# EAGLE board AHNS_Dev_Brd (EAGLE 5.08)
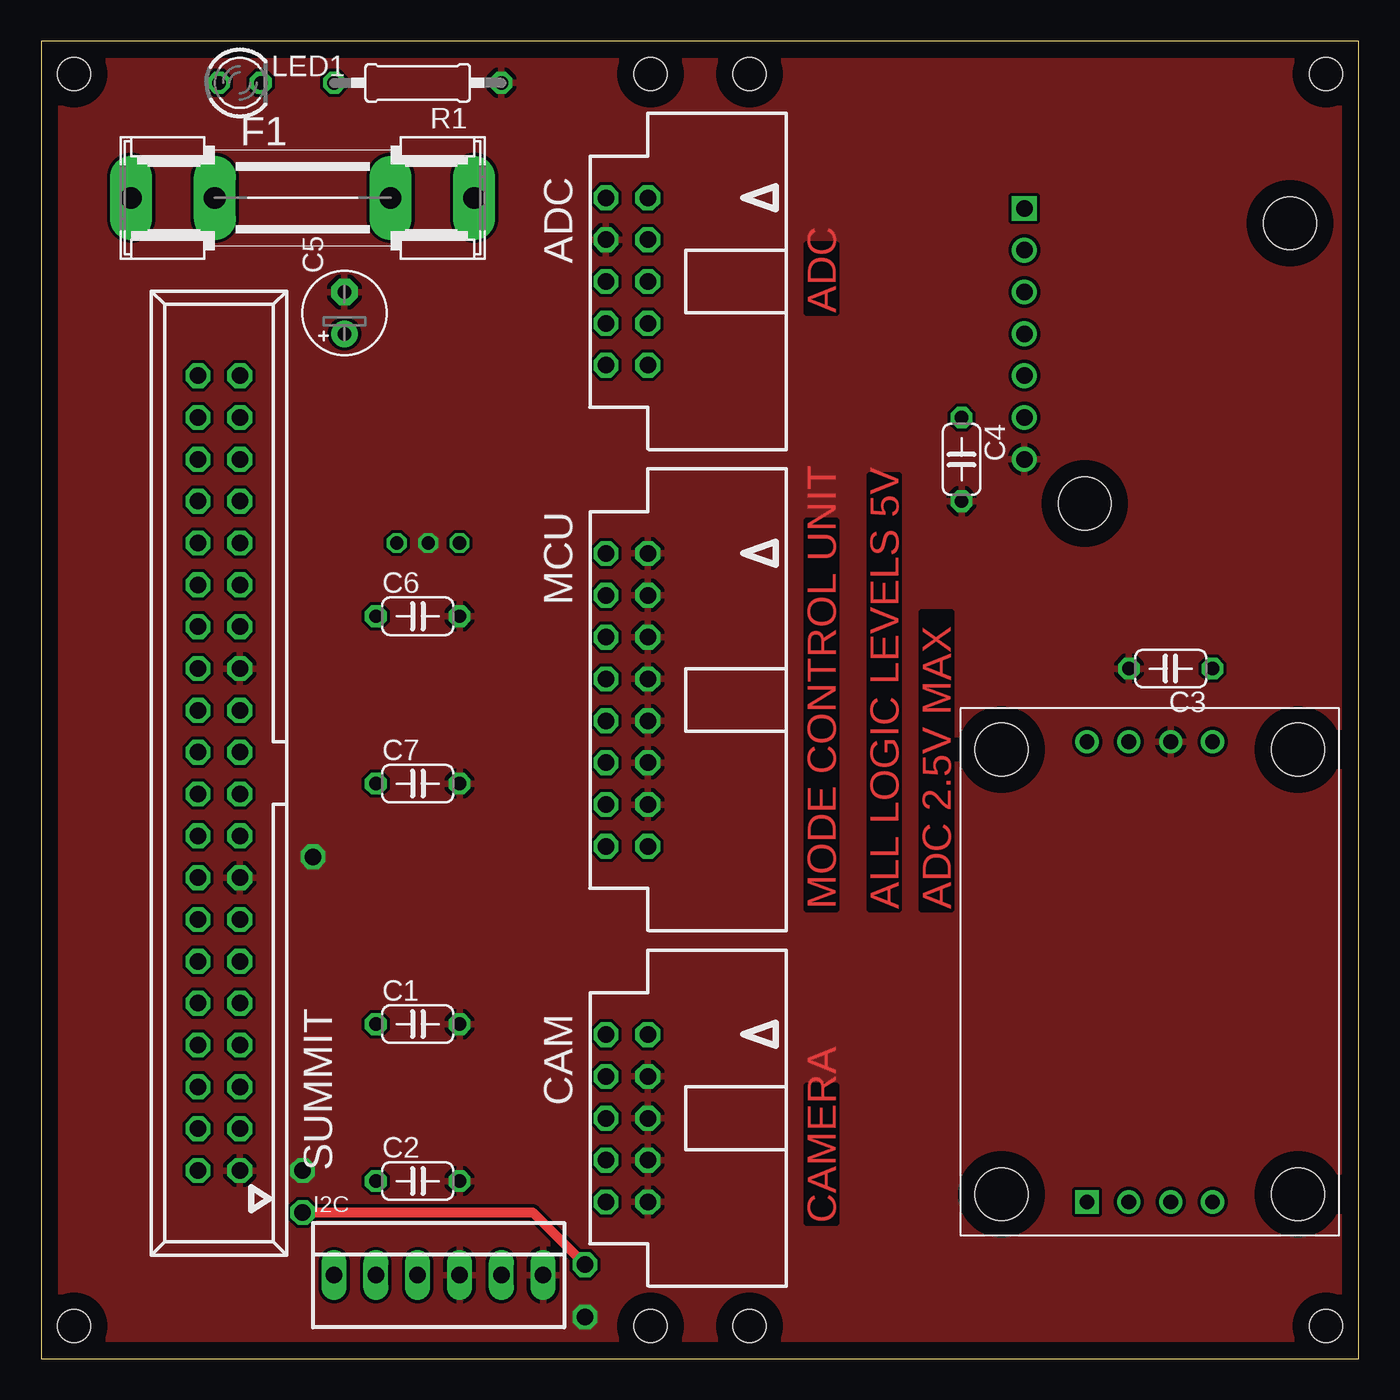
[diagram p0: board, top side]
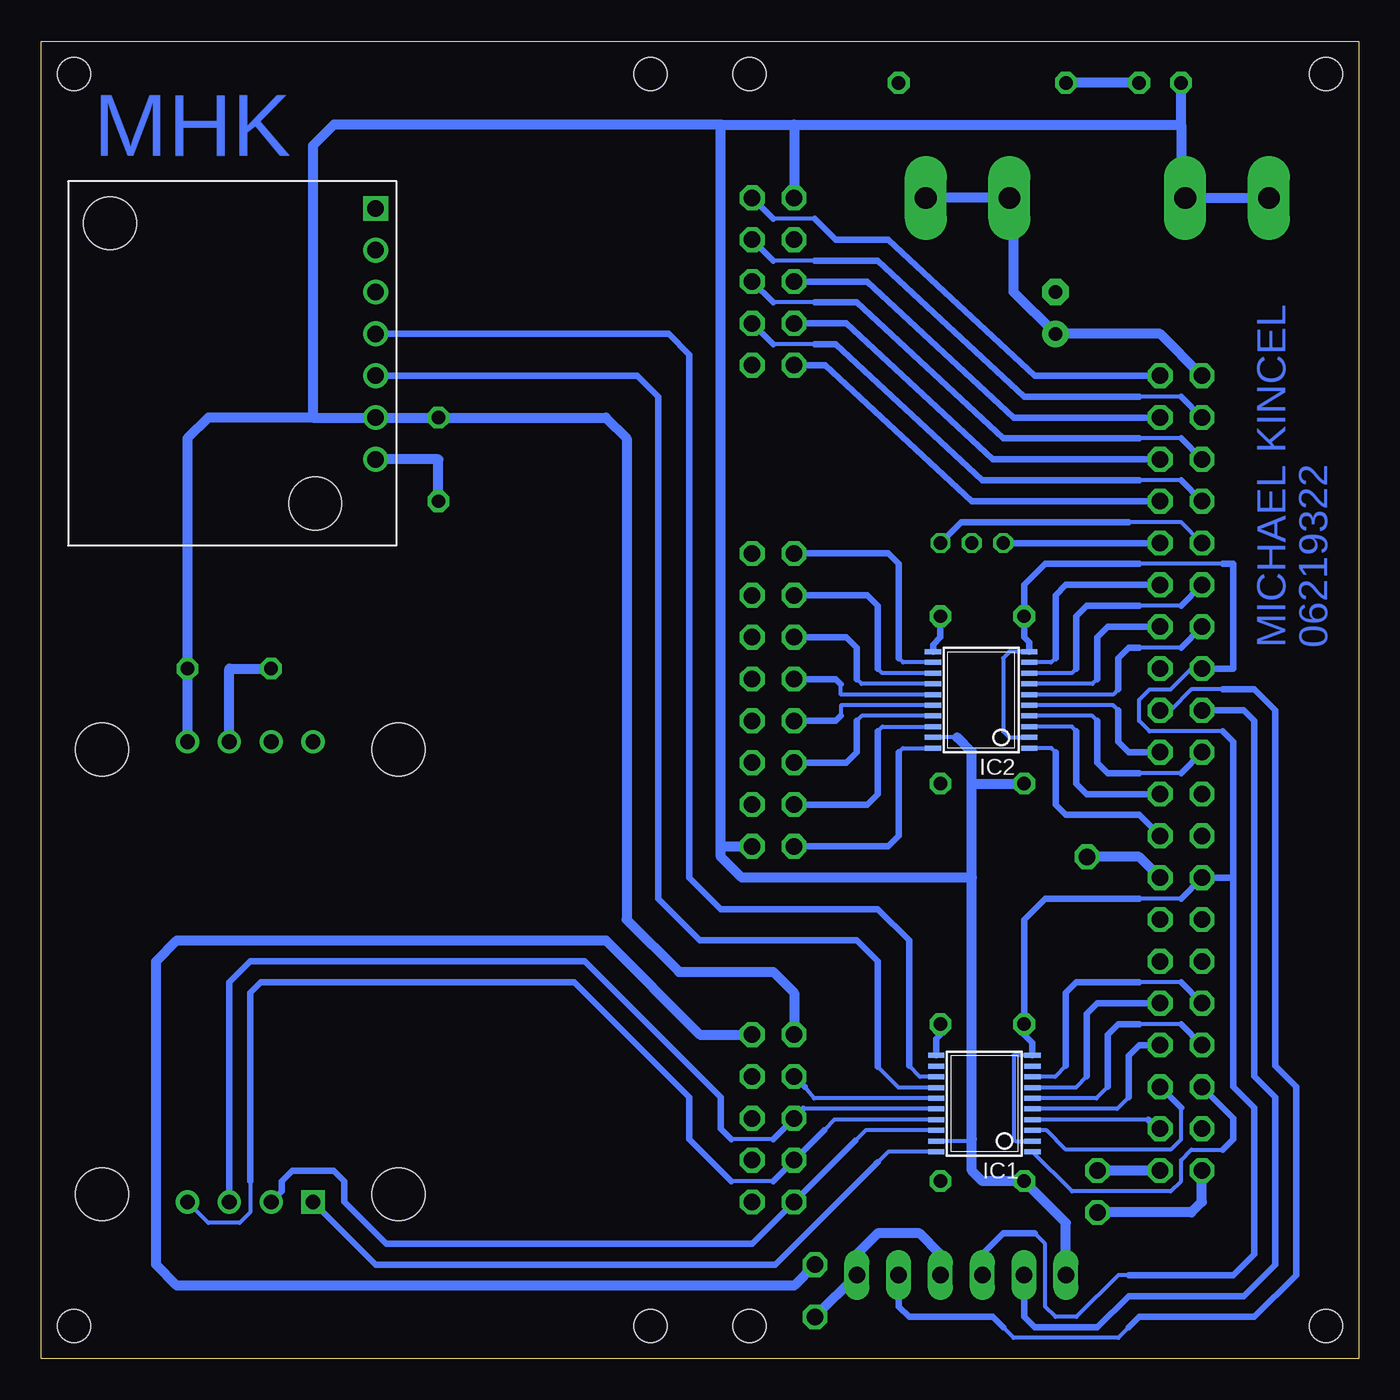
[diagram p1: board, bottom side, seen from below]

Size 80 x 80 mm. Coordinates in mm from the lower left corner, seen from the top.
Outline: 0,0 80,0 80,80 0,80 0,0
Copper layers (1*16): Top 0.035mm / dielectric 1.5mm / Bottom 0.035mm
Design rules "default": minimum track width 10mil, minimum drill 24mil, track to track 8mil, track to pad 8mil, pad to pad 8mil, via to via 8mil, smd to smd 8mil, copper to edge 40mil, drill to drill 8mil, minimum pad ring 10mil, minimum via ring 8mil, stop-mask expansion 4mil, vias tented up to drill 0mil, thermal gap 10mil
Holes 2 mm at 2,2 2,78 78,2 78,78 37,78 37,2 43,78 43,2

## Footprints (pad centres in the part's own frame; a part is rotated, then mirrored left to right if it is on the bottom)
057-010-0 = drill 1 octagon: 1 -5.08,-5.08; 2 -5.08,-2.54; 3 -2.54,-5.08; 4 -2.54,-2.54; 5 0,-5.08; 6 0,-2.54; 7 2.54,-5.08; 8 2.54,-2.54; 9 5.08,-5.08; 10 5.08,-2.54
C050-024X044 = drill 0.813 octagon: 1 -2.54,0; 2 2.54,0
E2,5-5 = drill 0.813 pad 1.6 round: + -1.27,0 | drill 0.813 pad 1.6 octagon: - 1.27,0
SHK20L = drill 1.321 pad 2.54 long: 1A -10.414,0; 1B -5.334,0; 2A 10.414,0; 2B 5.334,0
22-23-2061 = drill 1 long: 1 -6.35,0; 2 -3.81,0; 3 -1.27,0; 4 1.27,0; 5 3.81,0; 6 6.35,0
TSSOP20 = smd 0.305 x 0.991: 1 -2.925,-2.918; 2 -2.275,-2.918; 3 -1.625,-2.918; 4 -0.975,-2.918; 5 -0.325,-2.918; 6 0.325,-2.918; 7 0.975,-2.918; 8 1.625,-2.918; 9 2.275,-2.918; 10 2.925,-2.918; 11 2.925,2.918; 12 2.275,2.918; 13 1.625,2.918; 14 0.975,2.918; 15 0.325,2.918; 16 -0.325,2.918; 17 -0.975,2.918; 18 -1.625,2.918; 19 -2.275,2.918; 20 -2.925,2.918
SEN_DYN_6DOF_IMU = drill 0.9 square: CS 13.97,-3.81 | drill 0.9 round: GND -13.97,1.27; MISO 13.97,1.27; MOSI 13.97,-1.27; SCK 13.97,3.81; UARTRX -13.97,-1.27; UARTTX -13.97,-3.81; VCC -13.97,3.81 | hole 3.2: -13.5,-9; 13.5,-9; 13.5,9; -13.5,9
LED3MM = drill 0.813 octagon: A -1.27,0; K 1.27,0
057-016-0 = drill 1 octagon: 1 -8.89,-5.08; 2 -8.89,-2.54; 3 -6.35,-5.08; 4 -6.35,-2.54; 5 -3.81,-5.08; 6 -3.81,-2.54; 7 -1.27,-5.08; 8 -1.27,-2.54; 9 1.27,-5.08; 10 1.27,-2.54; 11 3.81,-5.08; 12 3.81,-2.54; 13 6.35,-5.08; 14 6.35,-2.54; 15 8.89,-5.08; 16 8.89,-2.54
0207/10 = drill 0.813 octagon: 1 -5.08,0; 2 5.08,0
057-040-1 = drill 1 octagon: 1 -24.13,-1.27; 2 -24.13,1.27; 3 -21.59,-1.27; 4 -21.59,1.27; 5 -19.05,-1.27; 6 -19.05,1.27; 7 -16.51,-1.27; 8 -16.51,1.27; 9 -13.97,-1.27; 10 -13.97,1.27; 11 -11.43,-1.27; 12 -11.43,1.27; 13 -8.89,-1.27; 14 -8.89,1.27; 15 -6.35,-1.27; 16 -6.35,1.27; 17 -3.81,-1.27; 18 -3.81,1.27; 19 -1.27,-1.27; 20 -1.27,1.27; 21 1.27,-1.27; 22 1.27,1.27; 23 3.81,-1.27; 24 3.81,1.27; 25 6.35,-1.27; 26 6.35,1.27; 27 8.89,-1.27; 28 8.89,1.27; 29 11.43,-1.27; 30 11.43,1.27; 31 13.97,-1.27; 32 13.97,1.27; 33 16.51,-1.27; 34 16.51,1.27; 35 19.05,-1.27; 36 19.05,1.27; 37 21.59,-1.27; 38 21.59,1.27; 39 24.13,-1.27; 40 24.13,1.27
MAXBOTCIS_RANGE_FINDER = drill 1 round: AN -3.81,-8.89; GND 6.35,-8.89; PW -6.35,-8.89; RX -1.27,-8.89; TX 1.27,-8.89; V+ 3.81,-8.89 | drill 1 square: BW -8.877,-8.89 | hole 3.2: -7.988,7.239; 9.03,-5.22

## Placement (x,y rotation side)
ADC  057-010-0  [057-010-0]  39.37,65.41 270 top
C1  0.1u  [C050-024X044]  22.86,20.32 0 top
C2  0.1u  [C050-024X044]  22.86,10.79 0 top
C3  0.1u  [C050-024X044]  68.58,41.91 180 top
C4  0.1u  [C050-024X044]  55.88,54.61 270 top
C5  100u  [E2,5-5]  18.41,63.5 90 top
C6  0.1u  [C050-024X044]  22.86,45.09 0 top
C7  0.1u  [C050-024X044]  22.86,34.92 0 top
CAM  057-010-0  [057-010-0]  39.37,14.61 270 top
F1  [SHK20L]  15.88,70.48 0 top
I2C  [22-23-2061]  24.13,5.08 0 top
IC1  MAX3002  [TSSOP20]  22.73,15.49 90 bottom
IC2  MAX3002  [TSSOP20]  22.93,40.01 90 bottom
IMU  SEN_DYN_6DOF_IMU  [SEN_DYN_6DOF_IMU]  67.31,23.5 270 top
LED1  [LED3MM]  12.06,77.47 0 top
MCU  057-016-0  [057-016-0]  39.37,40.01 270 top
R1  1k  [0207/10]  22.86,77.47 180 top
SUMMIT  057-040-1  [057-040-1]  10.79,35.56 90 top
U$2  MAXBOTICS_RANGE_FINDER  [MAXBOTCIS_RANGE_FINDER]  68.58,60.96 270 top

## Library data of the parts
ADC CAM MCU SUMMIT = con-panduit
C1-C7 R1 = rcl
F1 = fuse
I2C = con-molex
IC1 IC2 = maxim-11
IMU U$2 = AHNS10
LED1 = led

## Nets
ADCIN2: ADC.8 SUMMIT.34
ADCIN3: ADC.4 SUMMIT.38
ADCIN4: ADC.2 SUMMIT.39
ADCIN5: ADC.6 SUMMIT.36
ADCIN6: ADC.7 SUMMIT.35
ADCIN7: ADC.9 SUMMIT.33
AGND: ADC.5 SUMMIT.37
C0_MCU: IC2.18 MCU.13
C1_MCU: IC2.20 MCU.15
CTS3: SUMMIT.20
ESC1_MCU: IC2.12 MCU.1
ESC2_MCU: IC2.13 MCU.3
ESC3_MCU: IC2.15 MCU.7
ESC4_MCU: IC2.14 MCU.5
GND: ADC.3 C1.2 C2.2 C3.2 C4.2 C5.- C6.2 C7.2 CAM.4 CAM.6 CAM.8 CAM.10 I2C.4 I2C.6 IC1.11 IC2.11 IMU.GND MCU.2 MCU.4 MCU.6 MCU.8 MCU.10 MCU.12 MCU.14 R1.1 SUMMIT.1 SUMMIT.15 SUMMIT.25 U$2.GND
GPIO128: IC2.1 SUMMIT.17
GPIO170: IC2.3 SUMMIT.19
N$1: LED1.K R1.2
POWERON: SUMMIT.14
PWM0: SUMMIT.31
PWM1: SUMMIT.32
PWM8: IC2.9 SUMMIT.29
PWM9: IC2.8 SUMMIT.30
PWM10: IC2.6 SUMMIT.28
PWM11: IC2.7 SUMMIT.27
RXD1: IC1.7 SUMMIT.9
RXD3: IC2.5 SUMMIT.21
RXD_MCU: IC2.17 MCU.11
RXD_RF: IC1.13 U$2.RX
SCL3: I2C.5 SUMMIT.23
SDA3: I2C.2 SUMMIT.24
SPI1_CLK: IC1.4 SUMMIT.3
SPI1_CS0: IC1.1 SUMMIT.6
SPI1_CS1: IC1.6 SUMMIT.8
SPI1_MISO: IC1.5 SUMMIT.7
SPI1_MOSI: IC1.3 SUMMIT.5
SPI1_NIRQ: SUMMIT.4
SPI_CLK_5V: CAM.7 IC1.17 IMU.SCK
SPI_CS_CAM: CAM.3 IC1.15
SPI_CS_IMU: IC1.20 IMU.CS
SPI_MISO_5V: CAM.5 IC1.16 IMU.MISO
SPI_MOSI_5V: CAM.9 IC1.18 IMU.MOSI
SYS_EN: SUMMIT.11
TS_IRQ: SUMMIT.18
TXD1: IC1.8 SUMMIT.10
TXD3: IC2.4 SUMMIT.22
TXD_MCU: IC2.16 MCU.9
TXD_RF: IC1.14 U$2.TX
V_BATT: C5.+ F1.2A SUMMIT.40
VBACKUP: SUMMIT.12
VCC_1.8: C1.1 C6.1 I2C.3 IC1.2 IC1.10 IC2.2 IC2.10 SUMMIT.16 SUMMIT.26
VCC_3.3: CAM.2 SUMMIT.2
VCC_5: ADC.1 C2.1 C3.1 C4.1 C7.1 CAM.1 F1.1A I2C.1 IC1.19 IC2.19 IMU.VCC LED1.A MCU.16 U$2.V+
WAKEUP: SUMMIT.13

## Tracks (layer width: path | path; a pad name or v marks a point on that pad's centre or on a via)
ADCIN2
  Bottom 0.254: 10.79,53.34 13.34,53.34 | 33.02,61.59 35.56,61.59
  Bottom 0.406: 35.56,61.59 ADC.8 | 13.34,53.34 22.86,53.34 31.75,61.59 33.02,61.59 | SUMMIT.34 10.79,53.34
ADCIN3
  Bottom 0.254: 33.02,66.67 35.56,66.67 | 10.79,58.42 13.34,58.42
  Bottom 0.406: 33.02,66.67 29.21,66.67 20.32,58.42 13.34,58.42 | 35.56,66.67 ADC.4 | SUMMIT.38 10.79,58.42
ADCIN4
  Bottom 0.254: 33.02,69.22 35.56,69.22
  Bottom 0.406: 33.02,69.22 31.75,67.94 28.57,67.94 19.68,59.69 SUMMIT.39 | 35.56,69.22 ADC.2
ADCIN5
  Bottom 0.254: 33.02,64.14 35.56,64.14 | 10.79,55.88 13.34,55.88
  Bottom 0.406: 35.56,64.14 ADC.6 | 33.02,64.14 30.48,64.14 21.59,55.88 13.34,55.88 | SUMMIT.36 10.79,55.88
ADCIN6
  Bottom 0.406: ADC.7 31.11,62.87 22.23,54.61 SUMMIT.35
ADCIN7
  Bottom 0.406: ADC.9 32.38,60.33 23.5,52.07 SUMMIT.33
AGND
  Bottom 0.406: ADC.5 29.84,65.41 20.95,57.15 SUMMIT.37
C0_MCU
  Bottom 0.254: IC2.18 28.93,38.38 29.21,38.1
  Bottom 0.406: 29.21,38.1 29.21,34.29 29.84,33.66 MCU.13
C1_MCU
  Bottom 0.254: IC2.20 27.69,37.08 27.94,36.83
  Bottom 0.406: 27.94,36.83 27.94,31.75 28.57,31.11 MCU.15
ESC1_MCU
  Bottom 0.254: IC2.12 27.68,42.28 27.94,42.55
  Bottom 0.406: 27.94,42.55 27.94,48.26 28.57,48.9 MCU.1
ESC2_MCU
  Bottom 0.254: IC2.13 28.93,41.63 29.21,41.91
  Bottom 0.406: 29.21,41.91 29.21,45.72 29.84,46.35 MCU.3
ESC3_MCU
  Bottom 0.254: IC2.15 31.44,40.33 31.44,40.97
  Bottom 0.406: MCU.7 31.75,41.27 31.44,40.97
ESC4_MCU
  Bottom 0.254: IC2.14 30.18,40.98 30.48,41.27
  Bottom 0.406: 30.48,41.27 30.48,43.18 31.11,43.81 MCU.5
GND  (via drill 0.8, 1)
  Bottom 0.406: IC2.11 25.85,43.37 25.4,43.81 C6.2 | IC1.11 25.65,19.43 25.4,19.68 C1.2
  Bottom 0.61: IMU.GND 68.58,41.91 C3.2 | U$2.GND 55.88,54.61 C4.2 | SUMMIT.15 13.34,30.48 v16.51,30.48 | SUMMIT.1 v15.88,11.43 | I2C.4 25.4,6.35 26.67,7.62 29.21,7.62 30.48,6.35 I2C.6 v33.02,2.54
  other vias: 23.5,49.53
  pour Top (isolate 0.203): 0.27,79.74 79.74,79.74 79.74,0.27 0.27,0.27
GPIO128
  Bottom 0.254: IC2.1 18.66,37.08 18.41,36.83
  Bottom 0.406: 18.41,36.83 18.41,33.66 17.78,33.02 13.34,33.02 SUMMIT.17
GPIO170
  Bottom 0.254: IC2.3 17.43,38.38 17.14,38.1
  Bottom 0.406: 17.14,38.1 17.14,34.92 16.51,34.29 SUMMIT.19
N$1
  Bottom 0.61: LED1.K R1.2
PWM0  (via drill 0.8)
  Bottom 0.406: SUMMIT.31 v21.59,49.53
PWM1  (via drill 0.8)
  Bottom 0.254: SUMMIT.32 10.79,50.8 13.97,50.8
  Bottom 0.406: 13.97,50.8 24.13,50.8 v25.4,49.53
PWM8
  Bottom 0.254: IC2.9 18.68,42.28 18.41,42.55
  Bottom 0.406: 18.41,42.55 18.41,46.35 17.78,46.99 SUMMIT.29
PWM9
  Bottom 0.254: IC2.8 17.43,41.63 17.14,41.91 | 10.79,45.72 13.34,45.72
  Bottom 0.406: 13.34,45.72 16.51,45.72 17.14,45.09 17.14,41.91 | SUMMIT.30 10.79,45.72
PWM10
  Bottom 0.254: IC2.6 14.91,40.33 14.61,40.64 | 10.79,43.18 13.34,43.18
  Bottom 0.406: 14.61,40.64 14.61,42.55 13.97,43.18 13.34,43.18 | SUMMIT.28 10.79,43.18
PWM11
  Bottom 0.254: IC2.7 16.17,40.98 15.88,41.27
  Bottom 0.406: 15.88,41.27 15.88,43.81 15.24,44.45 SUMMIT.27
RXD1
  Bottom 0.254: IC1.7 17.19,16.47 16.51,17.14
  Bottom 0.406: 16.51,17.14 16.51,20.95 15.88,21.59 SUMMIT.9
RXD3
  Bottom 0.254: IC2.5 14.91,39.68 14.61,39.37
  Bottom 0.406: 14.61,39.37 14.61,37.47 13.97,36.83 SUMMIT.21
RXD_MCU
  Bottom 0.254: IC2.17 30.18,39.03 30.48,38.73
  Bottom 0.406: 30.48,38.73 30.48,36.83 31.11,36.2 MCU.11
RXD_RF
  Bottom 0.254: IC1.13 26.64,17.12 27.3,17.78
  Bottom 0.406: 27.3,17.78 27.3,25.4 29.21,27.3 38.73,27.3 40.64,29.21 40.64,60.96 41.91,62.23 U$2.RX
SCL3
  Bottom 0.254: SUMMIT.23 11.43,39.37 10.16,40.64 8.26,40.64 | 13.97,1.91 14.61,1.27 20.95,1.27 21.59,1.91
  Bottom 0.406: 8.26,40.64 6.35,40.64 5.08,39.37 5.08,17.78 3.81,16.51 3.81,5.08 6.35,2.54 13.34,2.54 13.97,1.91 | 21.59,1.91 22.23,2.54 27.3,2.54 27.94,3.17 I2C.5
SDA3
  Bottom 0.406: SUMMIT.24 6.99,39.37 6.35,38.73 6.35,17.14 5.08,15.88 5.08,5.71 6.99,3.81 13.97,3.81 15.88,1.91 19.68,1.91 20.32,2.54 I2C.2
SPI1_CLK
  Bottom 0.254: 12.79,14.52 IC1.4
  Bottom 0.406: SUMMIT.3 12.79,14.52
SPI1_CS0
  Bottom 0.254: 19.55,12.57 IC1.1 17.41,10.16 11.43,10.16 10.79,10.79 10.79,12.06 10.16,12.7 8.26,12.7
  Bottom 0.406: SUMMIT.6 7.62,14.61 7.62,13.34 8.26,12.7
SPI1_CS1
  Bottom 0.254: IC1.6 15.93,15.82 15.24,16.51 | 10.79,20.32 13.34,20.32
  Bottom 0.406: 15.24,16.51 15.24,19.68 14.61,20.32 13.34,20.32 | SUMMIT.8 10.79,20.32
SPI1_MISO
  Bottom 0.254: IC1.5 14.68,15.17 13.97,15.88
  Bottom 0.406: 13.97,15.88 13.97,18.41 13.34,19.05 SUMMIT.7
SPI1_MOSI
  Bottom 0.254: IC1.3 18.95,13.87 17.78,12.7 11.43,12.7 10.79,13.34 10.79,15.24
  Bottom 0.406: 10.79,15.24 SUMMIT.5
SPI_CLK_5V
  Bottom 0.254: IMU.SCK 69.85,8.26 67.94,8.26 67.31,8.89 67.31,10.79 | 35.56,10.79 38.1,10.79 | IC1.17 31.84,14.52 32.47,13.88
  Bottom 0.406: 32.47,13.88 CAM.7 35.56,10.79 | 38.1,10.79 40.64,13.34 40.64,15.88 47.62,22.86 66.67,22.86 67.31,22.23 67.31,10.79
SPI_CS_CAM
  Bottom 0.254: IC1.15 33.08,15.82 33.66,16.51
  Bottom 0.406: 33.66,16.51 CAM.3
SPI_CS_IMU
  Bottom 0.254: 29.34,11.93 29.21,11.93 28.57,12.57 IC1.20
  Bottom 0.406: IMU.CS 59.69,5.71 35.43,5.71 29.21,11.93
SPI_MISO_5V
  Bottom 0.254: IC1.16 33.73,15.17 | 35.56,13.34 38.1,13.34
  Bottom 0.406: 33.73,15.17 CAM.5 35.56,13.34 | IMU.MISO 68.58,22.86 67.31,24.13 46.99,24.13 38.73,15.88 38.73,13.97 38.1,13.34
SPI_MOSI_5V
  Bottom 0.254: IC1.18 29.95,13.87 30.8,13.02
  Bottom 0.406: 30.58,13.23 30.8,13.02 CAM.9 36.83,6.99 59.05,6.99 61.59,9.53 61.59,10.79 62.23,11.43 64.77,11.43 65.41,10.79 65.41,10.16 IMU.MOSI
TXD1
  Bottom 0.254: IC1.8 18.44,17.12 17.78,17.78 | 10.79,22.86 13.34,22.86
  Bottom 0.406: 17.78,17.78 17.78,22.23 17.14,22.86 13.34,22.86 | SUMMIT.10 10.79,22.86
TXD3
  Bottom 0.254: IC2.4 16.17,39.03 15.88,38.73 | 10.79,35.56 13.34,35.56
  Bottom 0.406: 15.88,38.73 15.88,36.2 15.24,35.56 13.34,35.56 | SUMMIT.22 10.79,35.56
TXD_MCU
  Bottom 0.254: IC2.16 31.44,39.68 31.44,39.05
  Bottom 0.406: MCU.9 31.75,38.73 31.44,39.05
TXD_RF
  Bottom 0.254: IC1.14 27.94,16.47 29.21,17.74
  Bottom 0.406: U$2.TX 43.81,59.69 42.55,58.42 42.55,27.94 40.01,25.4 30.48,25.4 29.21,24.13 29.21,17.74
V_BATT
  Bottom 0.406: C5.+ 18.41,62.61
  Bottom 0.61: SUMMIT.40 12.06,62.23 C5.+ 20.95,64.77 20.95,70.48 F1.2A
VCC_1.8
  Bottom 0.254: 8.26,48.26 13.34,48.26 | IC2.2 21.22,37.73 21.59,38.1 21.59,42.55 21.2,42.93 IC2.10 | 10.79,27.94 13.34,27.94 | IC1.2 20.84,13.22 20.95,13.34 20.95,18.41 20.95,18.42 IC1.10 | 8.26,38.1 12.7,38.1 13.34,38.73 13.34,40.01 12.7,40.64 11.43,40.64 10.16,41.91 SUMMIT.26 | 19.68,7.62 19.05,6.99 19.05,3.17 18.41,2.54 17.14,2.54 14.61,5.08 13.97,5.08
  Bottom 0.406: 8.26,48.26 7.62,48.26 7.62,41.91 SUMMIT.26 | 13.34,48.26 19.05,48.26 20.32,46.99 C6.1 20.32,43.81 20.01,43.51 IC2.10 | IC1.10 19.82,19.18 20.32,19.68 C1.1 20.32,26.67 19.05,27.94 13.34,27.94 | 10.79,27.94 SUMMIT.16 7.62,29.21 | 7.62,29.21 7.62,37.47 8.26,38.1 | I2C.3 22.86,6.35 21.59,7.62 19.68,7.62 | 13.97,5.08 7.62,5.08 6.35,6.35 6.35,15.24 7.62,16.51 7.62,29.21
VCC_3.3  (via drill 1)
  Top 0.61: v15.88,8.89 29.84,8.89 v33.02,5.71
  Bottom 0.61: SUMMIT.2 9.53,9.53 10.16,8.89 v15.88,8.89 | CAM.2 40.01,19.68 45.72,25.4 71.75,25.4 73.03,24.13 73.03,5.71 71.75,4.45 34.29,4.45 v33.02,5.71
VCC_5
  Bottom 0.254: 24.39,37.73 IC2.19 | IC1.19 23.38,13.22 23.38,13.34 23.5,13.34
  Bottom 0.61: 24.39,37.73 23.5,36.83 23.5,34.92 | 23.5,34.92 C7.1 | 23.5,29.21 23.5,13.34 23.5,11.43 22.86,10.79 C2.1 17.78,8.26 I2C.1 | 23.5,29.21 23.5,34.92 | IMU.VCC C3.1 71.12,55.88 69.85,57.15 63.5,57.15 | CAM.1 34.29,22.23 35.56,23.5 41.27,23.5 44.45,26.67 44.45,55.88 45.72,57.15 C4.1 U$2.V+ 63.5,57.15 | F1.1A 10.79,70.48 10.79,74.93 | 10.79,74.93 LED1.A | 34.29,74.93 10.79,74.93 | 34.29,74.93 ADC.1 | 38.73,74.93 34.29,74.93 | 38.73,31.11 38.73,74.93 | 38.73,31.11 MCU.16 | 38.73,31.11 38.73,30.48 37.47,29.21 23.5,29.21 | 63.5,57.15 63.5,73.66 62.23,74.93 38.73,74.93

## Text on the board
Top: ADC | MODE CONTROL UNIT | ALL LOGIC LEVELS 5V | ADC 2.5V MAX | CAMERA
Bottom: MHK | 06219322 | MICHAEL KINCEL